# EAGLE board TarjetaDriverrobocup2025 (1) (EAGLE 9.6.2)
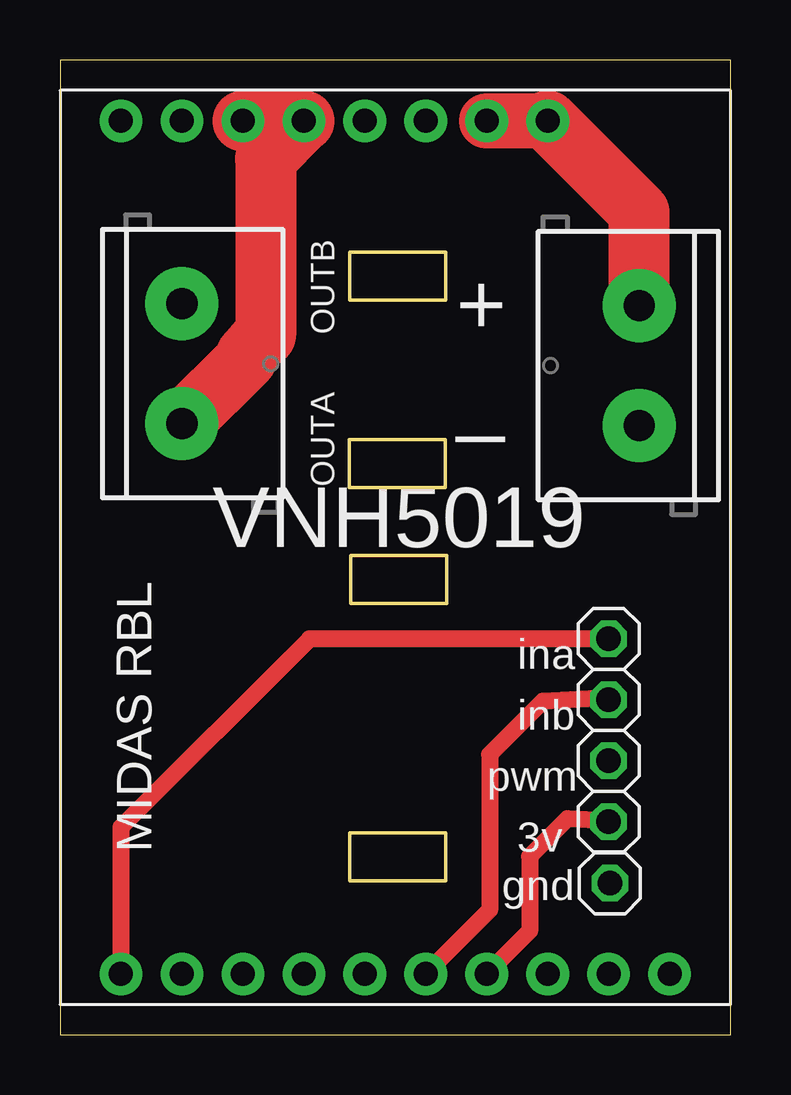
[diagram p0: board, top side]
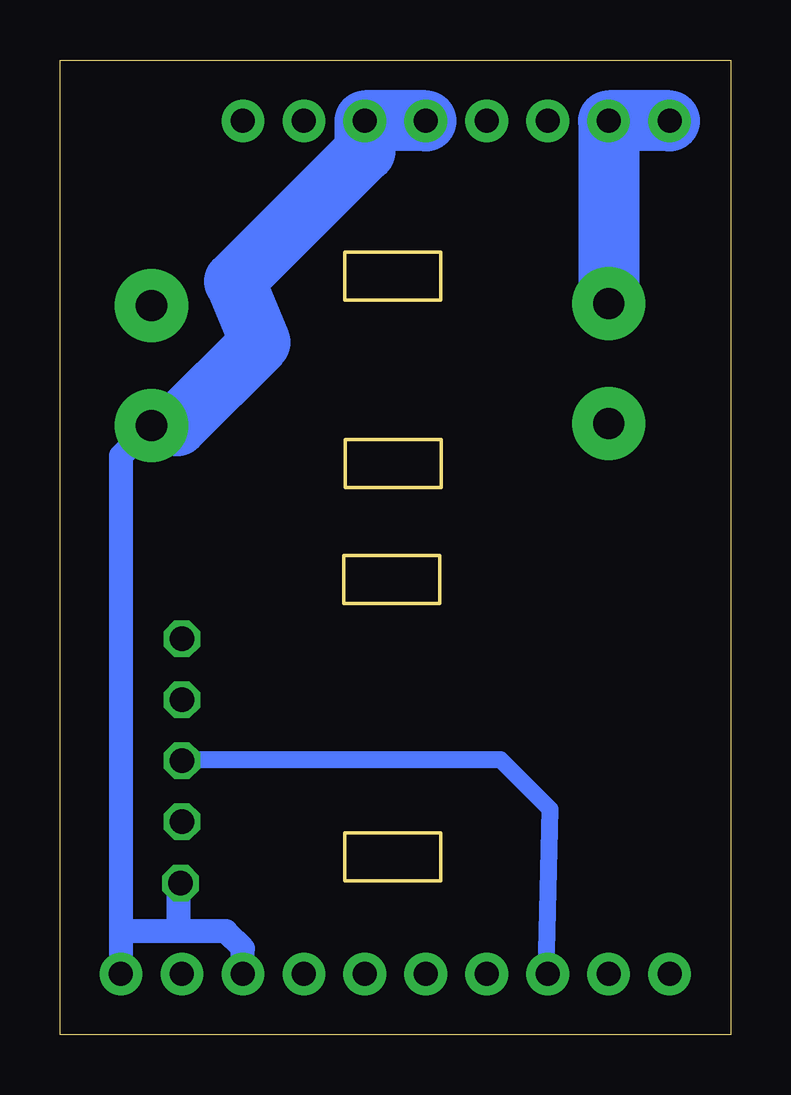
[diagram p1: board, bottom side, seen from below]

Size 27.94 x 40.64 mm. Coordinates in mm from the lower left corner, seen from the top.
Outline: 0,0 27.94,0 27.94,40.64 0,40.64 0,0
Outline: 12.08,8.43 12.08,6.43 16.08,6.43 16.08,8.43 12.08,8.43
Outline: 12.11,19.98 12.11,17.98 16.11,17.98 16.11,19.98 12.11,19.98
Outline: 12.05,24.82 12.05,22.82 16.05,22.82 16.05,24.82 12.05,24.82
Outline: 12.07,32.63 12.07,30.63 16.07,30.63 16.07,32.63 12.07,32.63
Copper layers (1*16): Top 0.035mm / dielectric 1.5mm / Bottom 0.035mm
Design rules "default": minimum track width 6mil, minimum drill 0.35mm, track to track 6mil, track to pad 6mil, pad to pad 6mil, via to via 6mil, smd to smd 6mil, copper to edge 40mil, drill to drill 6mil, minimum pad ring 10mil, minimum via ring 8mil, stop-mask expansion 4mil, vias tented up to drill 0mil, thermal gap 10mil

## Footprints (pad centres in the part's own frame; a part is rotated, then mirrored left to right if it is on the bottom)
1X01 = drill 1.016 octagon: 1 0,0
SCREWTERMINAL-5MM-2 = drill 1.3 pad 3.048: 1 0,0; 2 5,0
VISHAY = drill 1 pad 1.778: CS 10.16,1.27; ENA 5.08,1.27; ENB 12.7,1.27; GND1 20.32,1.27; GND2 25.4,1.27; GND3 12.7,36.83; GND4 15.24,36.83; INA 2.54,1.27; INB 15.24,1.27; OUTA1 2.54,36.83; OUTA2 5.08,36.83; OUTB1 7.62,36.83; OUTB2 10.16,36.83; PWM 7.62,1.27; VDD 17.78,1.27; VIN1 17.78,36.83; VIN2 20.32,36.83; VOUT 22.86,1.27

## Placement (x,y rotation side)
E$1  [1X01]  22.86,8.89 90 top
E$2  [1X01]  22.86,11.43 90 top
E$3  [1X01]  22.86,13.97 90 top
E$4  [1X01]  22.86,16.51 90 top
E$5  [SCREWTERMINAL-5MM-2]  5.08,30.48 270 top
E$6  [1X01]  22.91,6.32 0 top
E$7  [SCREWTERMINAL-5MM-2]  24.13,25.4 90 top
E$15  [VISHAY]  0,1.27 0 top

## Library data of the parts
E$1-E$4 E$6 = pinhead
E$5 E$7 = SparkFun-Connectors
E$15 = VISHAY

## Nets
7VM: E$7.2 E$15.VIN1 E$15.VIN2
GND: E$6.1 E$7.1 E$15.GND1 E$15.GND2 E$15.GND3 E$15.GND4
OUTA: E$5.2 E$15.OUTB1 E$15.OUTB2
OUTB: E$5.1 E$15.OUTA1 E$15.OUTA2
S$5: E$4.1 E$15.INA
S$6: E$2.1 E$15.PWM
S$7: E$3.1 E$15.INB
S$8: E$1.1 E$15.VDD

## Tracks (layer width: path | path; a pad name or v marks a point on that pad's centre or on a via)
7VM
  Top 2.3: E$15.VIN1 E$15.VIN2
  Top 2.54: E$15.VIN2 24.13,34.29 24.13,30.48 E$7.2
GND
  Bottom 0.152: 20.32,3.6 20.31,3.61 | 25.34,4.32 25.4,4.26 | 22.99,6.25 E$6.1
  Bottom 1: E$7.1 25.4,24.13 25.4,4.26 E$15.GND2 | E$15.GND1 20.32,3.6 | 20.31,3.61 21.02,4.32 22.99,4.32 | 22.99,4.32 25.34,4.32 | 22.99,4.32 22.99,6.25
  Bottom 2.54: E$15.GND3 E$15.GND4 15.24,36.83 20.66,31.41 19.61,28.87 23.07,25.4 E$7.1
OUTA
  Top 2.54: E$15.OUTB1 E$15.OUTB2 8.57,36.51 8.57,29.17 8.53,29.21 7.77,28.34 7.77,28.17 E$5.2
OUTB
  Bottom 2.54: E$15.OUTA1 E$15.OUTA2 E$5.1
S$5
  Top 0.7: E$4.1 10.4,16.51 2.54,8.65 E$15.INA
S$6
  Bottom 0.7: E$15.PWM 7.71,2.63 7.53,9.41 9.59,11.48 22.81,11.48 E$2.1
S$7
  Top 0.7: E$15.INB 17.91,5.21 17.91,11.69 20.12,13.91 22.79,14.04 E$3.1
S$8
  Top 0.7: E$15.VDD 19.57,4.33 19.57,7.44 21.14,9.01 22.82,8.93 E$1.1

## Text on the board
tPlace: OUTB | + | _ | OUTA | ina | inb | pwm | MIDAS RBL | 3v | gnd